# EAGLE board atmel_midi_cv_basic (EAGLE 7.6.0)
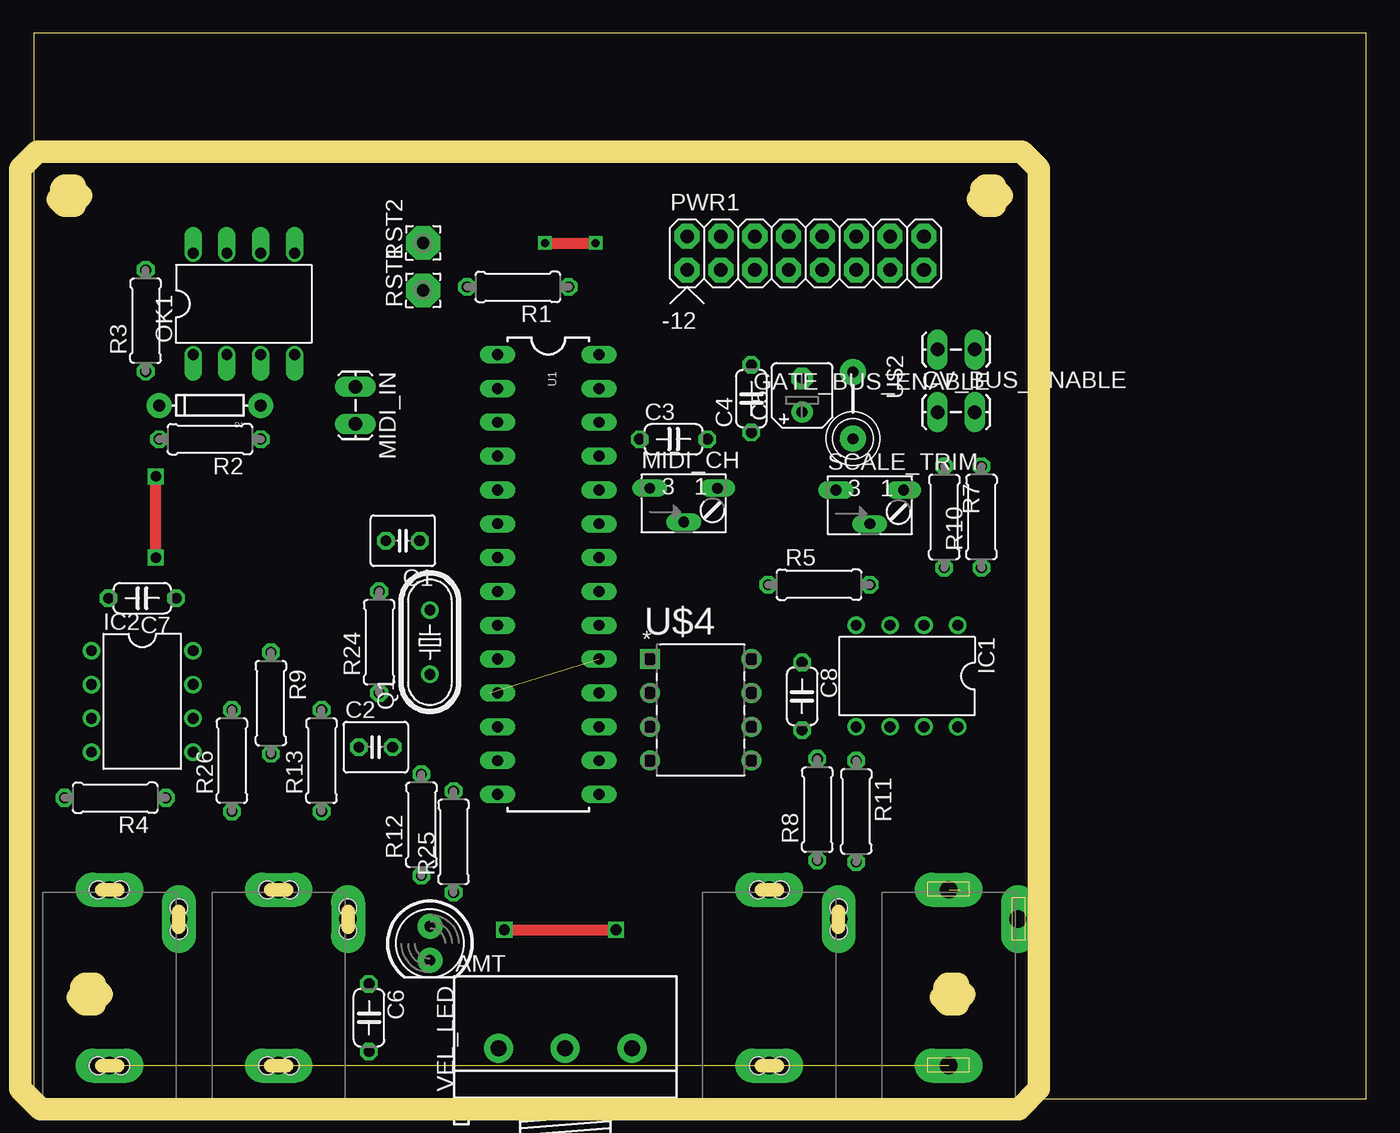
[diagram p0: board, top side]
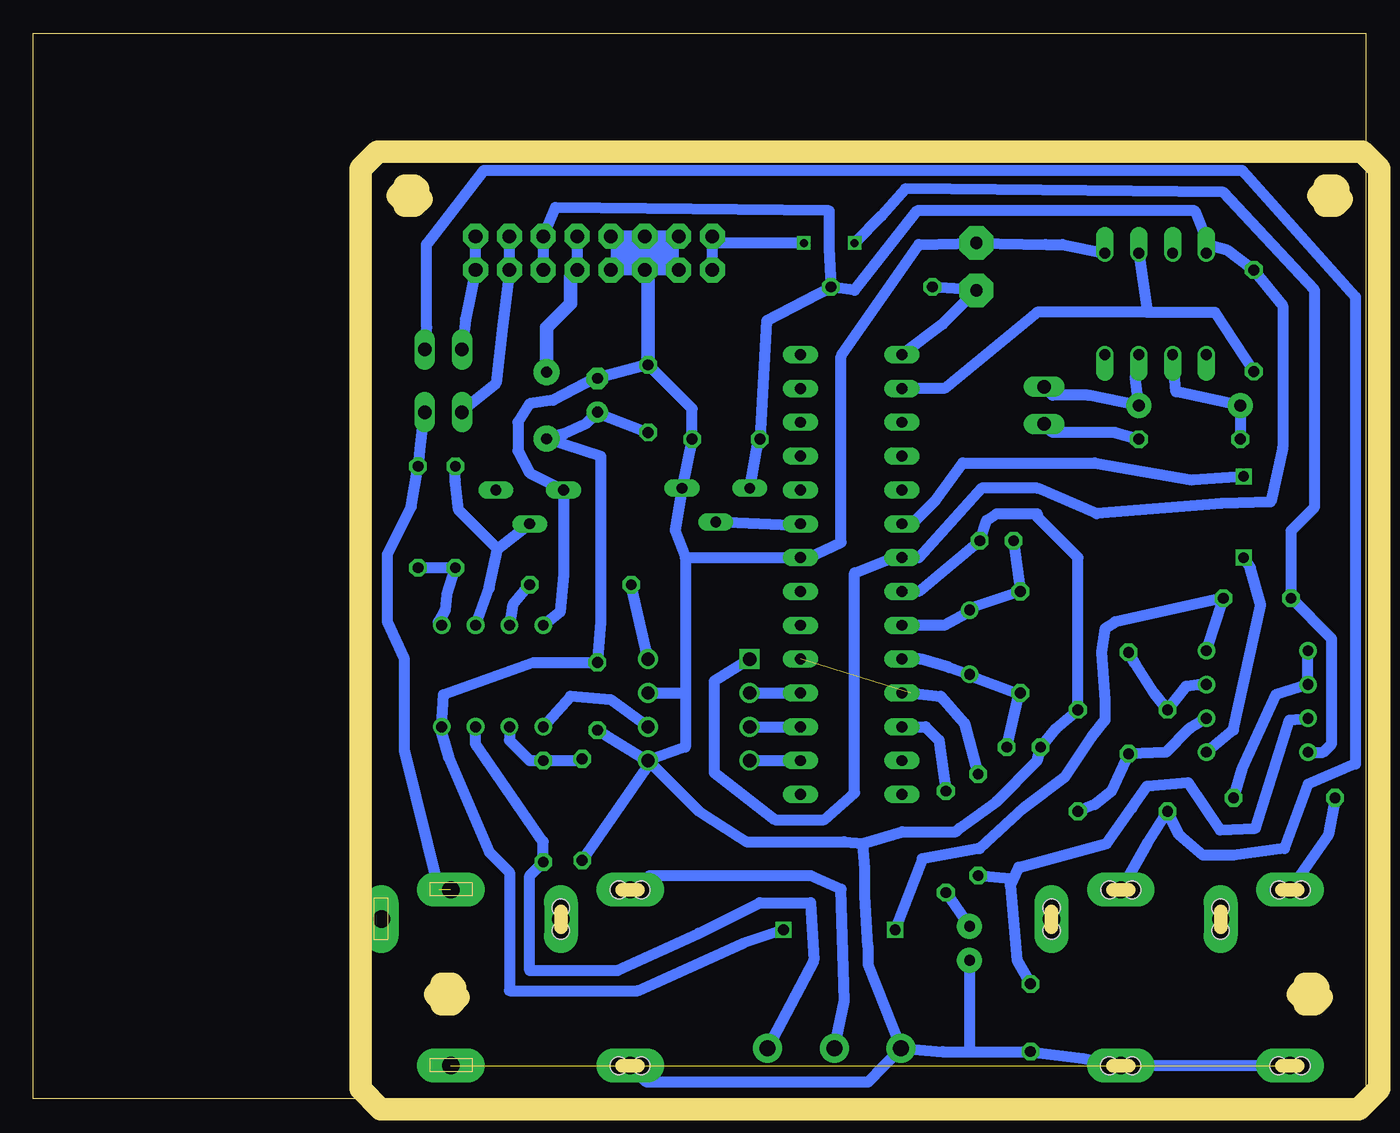
[diagram p1: board, bottom side, seen from below]

Size 100 x 80 mm. Coordinates in mm from the lower left corner, seen from the top.
Outline: 0,0 100,0 100,80 0,80 0,0
Copper layers (1*16): Top 0.035mm / dielectric 1.5mm / Bottom 0.035mm
Design rules "default *": minimum track width 32mil, minimum drill 31mil, track to track 16mil, track to pad 16mil, pad to pad 16mil, via to via 16mil, smd to smd 8mil, copper to edge 0mil, drill to drill 16mil, minimum pad ring 10mil, minimum via ring 8mil, stop-mask expansion 4mil, vias tented up to drill 0mil, thermal gap 10mil
Net classes: 1 GND: width 1.016 mm, drill 1.016 mm, clearance 0.508 mm
Milling: 44 lines

## Footprints (pad centres in the part's own frame; a part is rotated, then mirrored left to right if it is on the bottom)
3RP/1610N = drill 1.2 pad 2.184: 1 -5,0; 2 0,0; 3 5,0
C025-040X050 = drill 0.813 octagon: 1 -1.27,0; 2 1.27,0
C050-024X044 = drill 0.813 octagon: 1 -2.54,0; 2 2.54,0
B45181A = drill 0.813 pad 1.6: + -1.27,0 | drill 0.813 pad 1.6 octagon: - 1.27,0
1X02_LOCK_LONGPADS = drill 1.016 long: 1 -0.127,0; 2 2.667,0
DIODE-1N4148 = drill 0.9 pad 1.88: A -3.81,0; C 3.81,0
ERTHENVAR-JACK-90DEG = drill 1.3 pad 2.54 long: P$1 5,-2.5; P$2 -0.2,-13.5; P$3 5,-15.7 | hole 1.3: 5.842,-2.489; 4.14,-2.489; -0.203,-12.649; -0.203,-14.351; 5.842,-15.697; 4.166,-15.697
DIL08 = drill 0.813 pad 1.27: 1 -3.81,-3.81; 2 -1.27,-3.81; 3 1.27,-3.81; 4 3.81,-3.81; 5 3.81,3.81; 6 1.27,3.81; 7 -1.27,3.81; 8 -3.81,3.81
JACK-90DEG-ITEAD = drill 1.3 pad 2.54 long: P$1 5,-2.5; P$2 -0.2,-13.5; P$3 5,-15.7
B64W = drill 0.813 long: A 2.54,0; E -2.54,0; S 0,-2.54
DIL08' = drill 0.813 offset: 1 -3.81,-3.81; 2 -1.27,-3.81; 3 1.27,-3.81; 4 3.81,-3.81; 5 3.81,3.81; 6 1.27,3.81; 7 -1.27,3.81; 8 -3.81,3.81
POWER_16 = drill 1.016 pad 1.88 octagon: 1 -6.35,-1.27; 2 -6.35,1.27; 3 -3.81,-1.27; 4 -3.81,1.27; 5 -1.27,-1.27; 6 -1.27,1.27; 7 1.27,-1.27; 8 1.27,1.27; 9 3.81,-1.27; 10 3.81,1.27; 11 6.35,-1.27; 12 6.35,1.27; 13 8.89,-1.27; 14 8.89,1.27; 15 11.43,-1.27; 16 11.43,1.27
HC49/S = drill 0.813: 1 -2.413,0; 2 2.413,0
0207/7 = drill 0.813 octagon: 1 -3.81,0; 2 3.81,0
2,54/0,9 = drill 0.914 pad 2.54 octagon: 1 0,0
DIL28-3 = drill 0.813 long: 1 -16.51,-3.81; 2 -13.97,-3.81; 3 -11.43,-3.81; 4 -8.89,-3.81; 5 -6.35,-3.81; 6 -3.81,-3.81; 7 -1.27,-3.81; 8 1.27,-3.81; 9 3.81,-3.81; 10 6.35,-3.81; 11 8.89,-3.81; 12 11.43,-3.81; 13 13.97,-3.81; 14 16.51,-3.81; 15 16.51,3.81; 16 13.97,3.81; 17 11.43,3.81; 18 8.89,3.81; 19 6.35,3.81; 20 3.81,3.81; 21 1.27,3.81; 22 -1.27,3.81; 23 -3.81,3.81; 24 -6.35,3.81; 25 -8.89,3.81; 26 -11.43,3.81; 27 -13.97,3.81; 28 -16.51,3.81
FB = drill 0.8 pad 1.93: P$1 -2.5,0; P$2 2.5,0
DIP254P762X432-8 = drill 0.991 square: 1 -7.62,7.62 | drill 0.991: 2 -7.62,5.08; 3 -7.62,2.54; 4 -7.62,0; 5 0,0; 6 0,2.54; 7 0,5.08; 8 0,7.62
LED5MM = drill 0.813 pad 1.88: A -1.27,0; K 1.27,0

## Placement (x,y rotation side)
AMT  100k  [3RP/1610N]  39.88,3.81 0 top
C1  27pF  [C025-040X050]  27.69,41.91 180 top
C2  27pF  [C025-040X050]  25.65,26.42 0 top
C3  .1uF  [C050-024X044]  48.01,49.53 0 top
C4  100n  [C050-024X044]  53.85,52.58 90 top
C5  10u  [B45181A]  57.66,52.83 90 top
C6  100n  [C050-024X044]  25.15,6.1 270 top
C7  100n  [C050-024X044]  8.13,37.59 180 top
C8  100n  [C050-024X044]  57.66,30.23 270 top
CV_BUS_ENABLE  M02LOCK_LONGPADS  [1X02_LOCK_LONGPADS]  67.94,51.56 0 top
D1  [DIODE-1N4148]  13.21,52.07 180 top
GATE  AUDIO-JACK  [ERTHENVAR-JACK-90DEG]  23.37,0 180 top
GATE_BUS_ENABLE  M02LOCK_LONGPADS  [1X02_LOCK_LONGPADS]  70.48,56.26 180 top
IC1  TL072P  [DIL08]  65.53,31.75 180 top
IC2  TL072P  [DIL08]  8.13,29.84 270 top
JCK1  AUDIO-JACKITEAD  [JACK-90DEG-ITEAD]  73.66,0 180 top
MIDI_CH  100k  [B64W]  48.77,45.85 0 top
MIDI_IN  M02LOCK_LONGPADS  [1X02_LOCK_LONGPADS]  24.13,53.34 270 top
OK1  6N138  [DIL08']  15.75,59.69 0 top
PWR1  POWER  [POWER_16]  55.37,63.5 0 top
Q1  [HC49/S]  29.72,34.29 90 top
R1  10k  [0207/7]  36.32,60.96 180 top
R2  220  [0207/7]  13.21,49.53 180 top
R3  270  [0207/7]  8.38,58.42 90 top
R4  1k  [0207/7]  6.1,22.61 180 top
R5  3k3  [0207/7]  58.93,38.61 0 top
R7  5k  [0207/7]  68.33,43.69 270 top
R8  1k  [0207/7]  58.8,21.72 90 top
R9  1k5  [0207/7]  17.78,29.72 270 top
R10  1k  [0207/7]  71.12,43.69 90 top
R11  1k5  [0207/7]  61.72,21.59 270 top
R12  3k9  [0207/7]  29.08,20.57 90 top
R13  1k  [0207/7]  21.59,25.4 90 top
R24  1M  [0207/7]  25.91,34.29 90 top
R25  470  [0207/7]  31.5,19.3 90 top
R26  1k  [0207/7]  14.86,25.4 90 top
RST1  reset  [2,54/0,9]  29.21,60.71 90 top
RST2  reset  [2,54/0,9]  29.21,64.26 90 top
SCALE_TRIM  10k  [B64W]  62.74,45.72 0 top
TONE_OUT  AUDIO-JACK  [ERTHENVAR-JACK-90DEG]  10.67,0 180 top
U1  ATMEGA328P_PDIP  [DIL28-3]  38.61,39.37 270 top
U$2  FB  [FB]  61.47,52.07 270 top
U$4  MCP4822-E/P  [DIP254P762X432-8]  53.85,25.4 0 top
VEL  AUDIO-JACK  [ERTHENVAR-JACK-90DEG]  60.2,0 180 top
VEL_LED  [LED5MM]  29.72,11.68 270 top

## Library data of the parts
AMT MIDI_CH SCALE_TRIM = pot
C1-C8 R1-R5 R7-R13 R24-R26 = rcl
CV_BUS_ENABLE GATE_BUS_ENABLE MIDI_IN = SparkFun-Connectors
D1 = SparkFun-DiscreteSemi
GATE JCK1 TONE_OUT VEL = erthenvar
IC1 IC2 = linear
OK1 = optocoupler; MF: VISHAY/TELEFUNKEN; MPN: 6N138; OC_FARNELL: 9860150; OC_NEWARK: 35K5294
PWR1 = eurorack
Q1 = crystal; OC_FARNELL: 1667008; OC_NEWARK: unknown
RST1 RST2 = wirepad
U1 = SparkFun-DigitalIC
U$2 = adafruit
U$4 = MCP4822; MPN: MCP4822-E/P; OC_FARNELL: 1439413; OC_NEWARK: 11M1705; PACKAGE: DIP-8; SUPPLIER: Microchip
VEL_LED = SparkFun-LED

## Nets
+5V: C3.1 MIDI_CH.E OK1.8 PWR1.11 PWR1.12 R1.1 R3.2 U1.7 U$4.1
+12V: C4.1 C5.+ C7.1 C8.1 IC1.8 IC2.8 U$2.P$2
-12V: C7.2 IC2.4 PWR1.1 PWR1.2
GND: VEL_LED.K
N$1: GATE_BUS_ENABLE.2 PWR1.15 PWR1.16
N$2: R5.1 U$4.8
N$3: D1.A MIDI_IN.1 OK1.3
N$4: C1.2 Q1.2 R24.2 U1.9
N$5: C2.2 Q1.1 R24.1 U1.10
N$6: IC1.3 R5.2
N$7: D1.C OK1.2 R2.2
N$8: MIDI_IN.2 R2.1
N$9: CV_BUS_ENABLE.2 JCK1.P$3 R10.2
N$10: IC2.6 R9.2 R13.1
N$11: PWR1.9 PWR1.10 U$2.P$1
N$12: IC1.2 R7.1 SCALE_TRIM.S
N$13: IC1.6 R8.2 R11.1
N$14: IC1.5 U$4.6
N$15: CV_BUS_ENABLE.1 PWR1.13 PWR1.14
N$16: IC2.7 R9.1 R26.2
N$17: AMT.3 IC1.7 R11.2
N$18: R25.1 VEL_LED.A
N$19: MIDI_CH.S U1.23
N$20: R25.2 U1.12
N$21: R12.2 U1.19
N$22: IC2.5 U1.6
N$23: IC2.1 IC2.2 R4.1
N$24: R4.2 TONE_OUT.P$3
N$25: U1.17 U$4.3
N$26: U1.16 U$4.4
N$27: IC1.1 R7.2 R10.1
N$28: C6.1 IC2.3 R12.1
N$29: AMT.1 C1.1 C2.1 C3.2 C4.2 C5.- C6.2 C8.2 GATE.P$1 IC1.4 JCK1.P$1 MIDI_CH.A OK1.5 PWR1.3 PWR1.4 PWR1.5 PWR1.6 PWR1.7 PWR1.8 R8.1 R13.2 RST2.1 SCALE_TRIM.E TONE_OUT.P$1 U1.8 U1.22 U$4.5 U$4.7 VEL.P$1
N$30: OK1.6 R3.1 U1.2
N$31: GATE.P$3 GATE_BUS_ENABLE.1 R26.1
N$43: R1.2 RST1.1 U1.1
N$45: U1.18 U$4.2
N$51: AMT.2 VEL.P$3

## Tracks (layer width: path | path; a pad name or v marks a point on that pad's centre or on a via)
+5V
  Bottom 0.813: U$4.1 48.9,31.37 48.9,24.51 44.32,20.95 40.64,20.95 38.35,22.99 38.35,39.5 35.43,40.64 U1.7 33.53,40.64 28.83,45.85 24.64,45.85 20.19,43.94 10.79,44.7 7.11,44.83 6.22,48.9 6.22,59.56 R3.2 10.41,63.75 11.81,64.14 | PWR1.11 PWR1.12 60.83,66.93 40.26,66.67 40.26,63.88 R1.1 | MIDI_CH.E 45.59,49.53 C3.1 44.96,58.42 R1.1 | 11.81,64.14 12.83,66.67 33.66,66.67 34.8,65.28 38.35,60.71 R1.1 | 11.81,64.14 OK1.8
+12V  (via drill 0.8)
  Top 0.813: v35.31,12.7 v43.69,12.7
  Bottom 0.813: C4.1 57.15,51.31 C5.+ 58.55,50.67 60.2,49.91 U$2.P$2 57.4,48.26 57.4,35.81 57.66,33.02 C8.1 62.48,32.77 69.22,30.35 IC1.8 69.34,27.43 68.83,25.65 65.79,18.54 64.26,17.02 64.26,8.13 54.61,8.13 46.74,11.68 v43.69,12.7 | IC2.8 11.18,36.07 C7.1 18.8,35.81 19.56,35.31 19.81,33.53 19.56,29.97 19.56,28.45 20.57,27.18 22.61,24.13 25.65,21.84 28.96,18.8 33.27,18.03 v35.31,12.7
-12V  (via drill 0.6)
  Top 0.813: v38.35,64.26 v42.16,64.26
  Bottom 0.813: IC2.4 3.17,26.04 2.54,26.67 2.54,34.54 C7.2 5.59,42.67 3.81,44.45 3.81,60.71 10.67,68.07 34.54,68.33 36.32,66.29 v38.35,64.26 | v42.16,64.26 48.51,64.26 PWR1.2 PWR1.1
N$1
  Bottom 0.813: GATE_BUS_ENABLE.2 67.56,58.55 PWR1.15 PWR1.16
N$2
  Bottom 0.813: U$4.8 R5.1
N$3
  Bottom 0.813: OK1.3 17.27,54.1 D1.A 20.83,52.83 23.5,52.83 MIDI_IN.1
N$4
  Bottom 0.813: C1.2 R24.2 29.72,36.83 Q1.2 29.97,36.45 31.62,35.56 U1.9
N$5
  Bottom 0.813: C2.2 26.04,30.35 | 26.04,30.35 R24.1 | 26.04,30.35 29.72,31.75 Q1.1 31.24,32.38 33.4,33.02 U1.10
N$6
  Bottom 0.813: IC1.3 64.01,37.08 R5.2
N$7
  Bottom 0.813: R2.2 D1.C 14.22,53.09 OK1.2
N$8
  Bottom 0.813: R2.1 18.8,50.04 23.5,50.04 MIDI_IN.2
N$9  (1 unrouted)
  Bottom 0.813: CV_BUS_ENABLE.2 70.48,51.31 70.74,51.05 70.99,48.77 R10.2 71.63,44.45 73.41,40.89 73.41,35.81 72.14,33.02 72.14,26.16 69.55,15.7
N$10
  Bottom 0.813: IC2.6 13.21,27.81 14.99,26.04 R9.2 19.05,23.11 20.32,22.1 R13.1
N$11
  Bottom 0.813: PWR1.10 PWR1.9
  Bottom 1.016: U$2.P$1 61.47,57.91 59.69,59.69 59.69,61.72 PWR1.9
N$12
  Bottom 0.813: 65.15,41.27 65.79,38.35 IC1.2 | 65.15,41.27 SCALE_TRIM.S | 65.15,41.27 68.07,44.2 68.33,46.48 R7.1
N$13
  Bottom 0.813: IC1.6 64.26,26.92 62.74,25.4 R11.1 58.93,25.4 R8.2
N$14
  Bottom 0.813: U$4.6 56.64,29.97 59.69,30.23 IC1.5
N$15
  Bottom 0.813: CV_BUS_ENABLE.1 67.31,52.07 65.28,53.72 64.77,58.04 PWR1.13 PWR1.14
N$16
  Bottom 0.813: IC2.7 12.57,31.11 13.46,30.99 R26.2 15.88,30.48 17.27,32.64 R9.1
N$17
  Bottom 0.813: AMT.3 41.4,10.41 41.66,14.73 45.47,14.73 50.04,12.45 56.13,9.65 62.74,9.65 62.74,16.76 R11.2 61.72,19.3 66.8,26.67 IC1.7
N$18
  Bottom 0.813: R25.1 VEL_LED.A
N$19
  Bottom 0.813: MIDI_CH.S 43.05,43.05 U1.23
N$20
  Bottom 0.813: U1.12 33.02,27.94 32,26.92 R25.2
N$21  (1 unrouted)
  Bottom 0.813: 34.16,30.48 31.88,30.23 30.1,28.19 R12.2
N$22  (via drill 0.8)
  Top 0.813: v9.14,40.64 v9.14,46.74
  Bottom 0.813: v9.14,46.74 12.95,46.48 20.32,47.75 30.23,47.75 32.26,44.96 34.04,43.18 U1.6 | IC2.5 9.91,27.69 7.87,37.08 8.64,39.88 v9.14,40.64
N$23
  Bottom 0.813: R4.1 9.27,24.77 6.73,30.35 IC2.2 IC2.1
N$24
  Bottom 0.813: R4.2 2.79,19.84 TONE_OUT.P$3
N$25
  Bottom 0.813: U$4.3 U1.17
N$26
  Bottom 0.813: U$4.4 U1.16
N$27
  Bottom 0.813: IC1.1 69.6,35.81 69.09,36.7 68.96,37.85 R7.2 R10.1
N$28
  Bottom 0.813: 26.67,16 26.16,10.41 C6.1 | 26.67,16 26.67,16.51 R12.1 | IC2.3 5.71,28.45 8.26,20.32 10.92,20.19 13.34,23.75 16.38,23.5 17.53,21.84 19.43,19.18 26.04,17.4 26.67,16
N$29  (1 unrouted)
  Bottom 0.813: AMT.1 34.8,3.81 31.75,3.56 C6.2 21.2,3.05 GATE.P$1 TONE_OUT.P$1 | 35.43,38.1 U1.8 33.53,38.1 C1.1 28.45,43.43 27.69,43.94 24.64,43.94 24.64,43.69 21.59,40.64 R13.2 23.24,27.81 C2.1 24.64,25.4 27.69,22.35 30.48,20.32 30.73,20.07 34.8,20.07 37.72,19.18 | IC1.4 60.45,36.58 60.2,39.37 SCALE_TRIM.E 62.74,46.99 63.63,48.64 63.63,50.8 62.74,52.2 60.96,52.45 57.78,54.1 C5.- C4.2 50.55,51.82 C3.2 MIDI_CH.A 51.82,42.67 51.05,40.64 | OK1.5 22.73,64.14 24,64.14 RST2.1 33.53,64.14 39.37,55.75 39.37,41.78 41.78,40.64 U1.22 51.05,40.64 | 53.72,25.27 R8.1 | 53.72,25.27 U$4.5 51.05,26.42 51.05,30.48 | 53.72,25.27 57.02,27.3 C8.2 | PWR1.7 54.61,62.23 PWR1.5 PWR1.3 arc87 PWR1.4 PWR1.6 PWR1.8 | 51.05,40.64 51.05,30.48 | 53.72,25.27 50.04,21.59 46.48,19.3 39.12,19.3 37.72,19.18 | VEL.P$1 53.97,1.27 37.34,1.27 AMT.1 | U$4.7 51.05,30.48 | 37.72,19.18 37.59,17.27 37.59,15.24 37.34,11.43 37.34,10.08 AMT.1
  Bottom 1.016: C4.2 53.85,61.47 54.61,62.23
N$30
  Bottom 0.813: OK1.6 16.38,59.05 | 16.38,59.05 11.3,59.05 R3.1 | U1.2 31.62,53.34 24.64,59.05 16.38,59.05
N$31
  Bottom 0.813: GATE_BUS_ENABLE.1 70.48,58.04 70.48,64.14 66.17,69.72 9.27,69.72 0.76,60.2 0.76,25.15 4.32,23.62 6.1,18.8 9.91,18.29 12.19,18.29 13.97,19.81 R26.1 16.38,19.21 GATE.P$3
N$32
  Bottom 0.813: 29.72,10.16 29.72,3.81
N$43
  Bottom 0.813: U1.1 31.75,58.17 RST1.1 R1.2
N$45
  Bottom 0.813: U$4.2 U1.18
N$51
  Bottom 0.813: AMT.2 39.12,7.37 39.37,15.75 41.66,16.76 53.72,16.76 VEL.P$3
(copper drawn outside any net)
  shapes: Bottom area x1